# Altium PCB ControlBoard.PcbDoc
Units mm, origin at the board's own origin, x right, y up, seen from the top; angles counter-clockwise.
Board outline 152.43 x 60.17 mm, 2 copper layers (Top Layer, Bottom Layer); 140 components, 89 nets, 445 pads, 166 vias.
Unrouted connection lines stored in the file: 69.
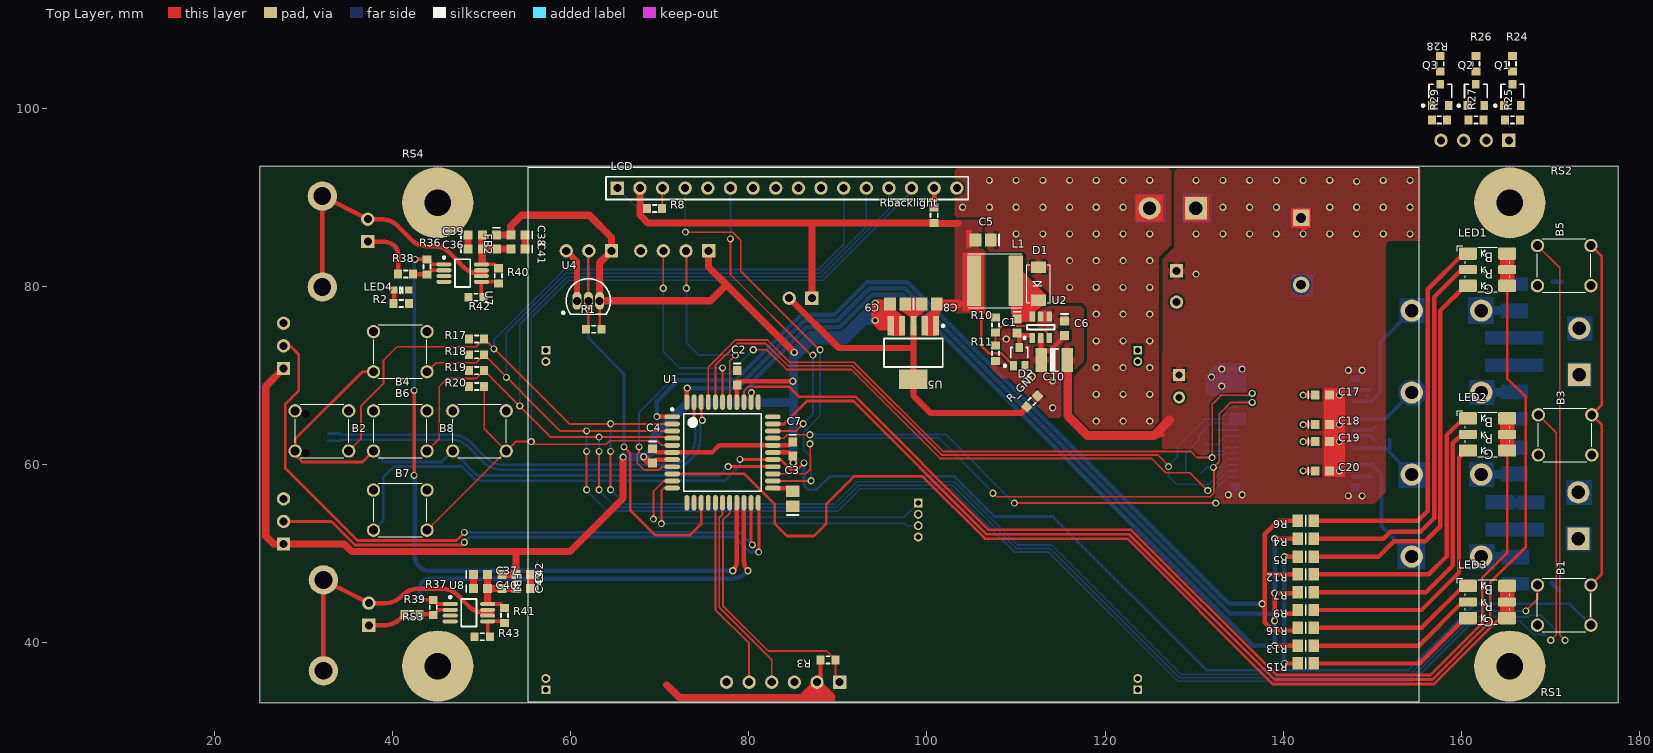
[diagram p0: Top Layer view]
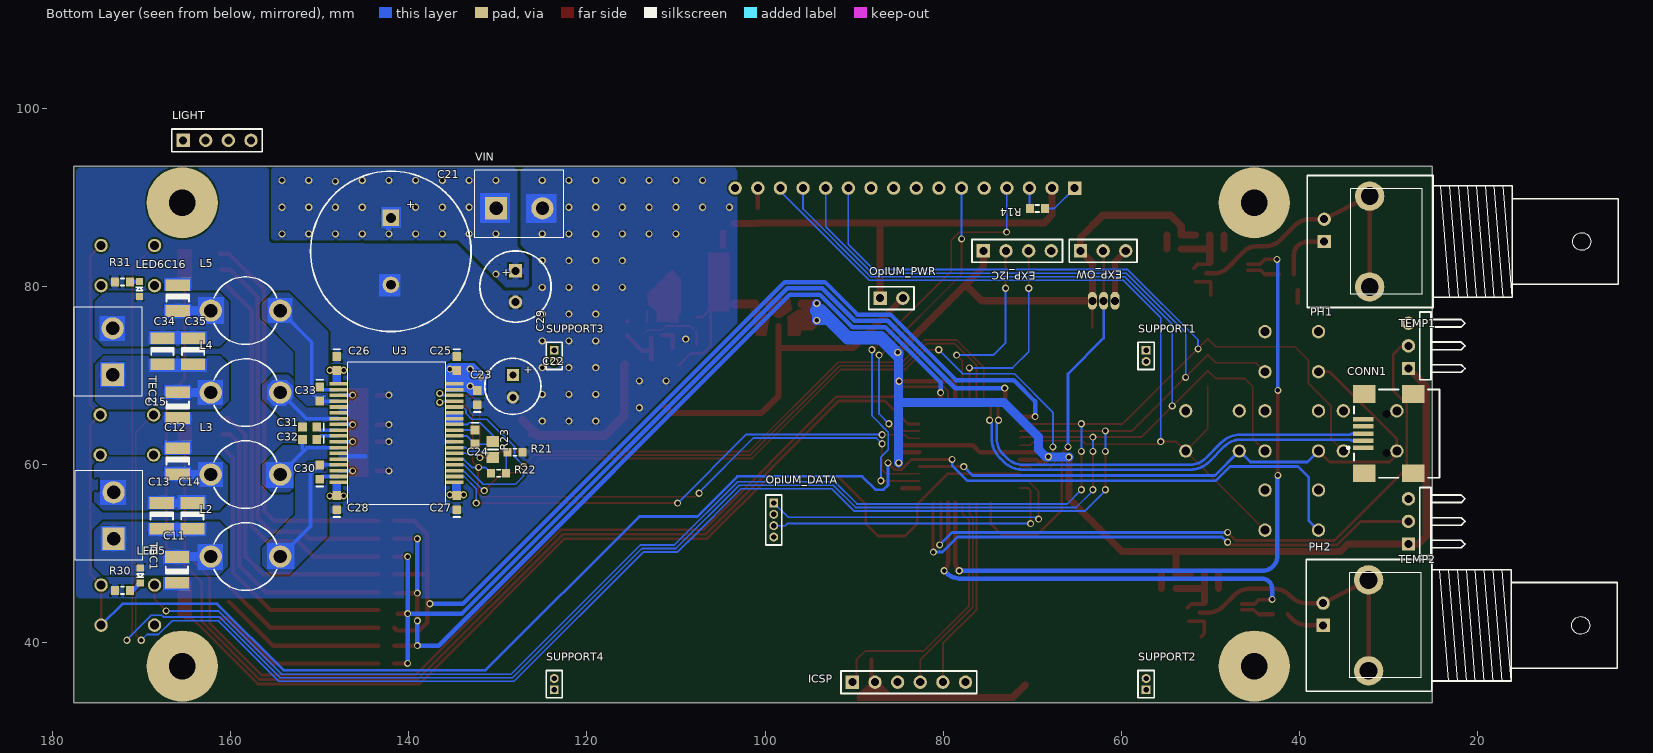
[diagram p1: Bottom Layer view, seen from below]

## Layer stack, top to bottom
Top Layer: signal copper 0.0356
Dielectric: dielectric 0.32, FR-4, Dk 4.8
Bottom Layer: signal copper 0.0356

## Board outline
25.15,33.3 177.575,33.3 177.546,93.472 25.146,93.472

## Design rules (kind name [scope] priority, off if disabled: settings)
Clearance [All] p1: gap=0.2
DiffPairsRouting [All] p1: maxlimit=0.254 minlimit=0.254 mostfreqgap=0.254 maxuncoupledlength=12.7
HoleSize [All] p1: absolutevalues=TRUE maxlimit=12.7 minlimit=0.5 maxpercent=80.000 minpercent=20.000
PolygonConnect [All] p1: connectstyle=Relief reliefconductorwidth=0.762 reliefentries=4 polygonreliefangle="90 Angle"
RoutingVias [All] p1: holewidth=0.5 width=0.8 viastyle="Through Hole" minholewidth=0.5 minwidth=0.8 maxholewidth=12.7 maxwidth=14
SilkscreenOverComponentPads [All] p1: minsilkscreentomaskgap=0.254
SolderMaskExpansion [All] p1: expansion=0.102
Width [All] p1: maxlimit=500 minlimit=0.2 preferedwidth=0.2
25 further rules are at their usual default settings.

## Classes and differential pairs
component class ControlBoard: C1 C2 C3 C4 C5 C6 C7 C8 C9 C10 D1 D2 ICSP L1 LED4 OpIUM_DATA OpIUM_PWR R1 R2 R3 R10 R11 R_GND RS1 RS2 RS3 RS4 SUPPORT1 SUPPORT2 SUPPORT3 SUPPORT4 U1 U2 U4 U5 VIN
component class IOBoard: B1 B2 B3 B4 B5 B6 B7 B8 C36 C37 C38 C39 C40 C41 C42 C43 CONN1 EXP_I2C EXP_OW FB1 FB2 LCD LED1 LED2 LED3 LIGHT PH1 PH2 Q1 Q2 Q3 R4 R5 R6 R7 R8 R9 R12 R13 R14 R15 R16 R17 R18 R19 R20 R24 R25 R26 R27 R28 R29 R36 R37 R38 R39 R40 R41 R42 R43 Rbacklight TEMP1 TEMP2 U7 U8
component class TECBoard: C11 C12 C13 C14 C15 C16 C17 C18 C19 C20 C21 C22 C23 C24 C25 C26 C27 C28 C29 C30 C31 C32 C33 C34 C35 L2 L3 L4 L5 LED5 LED6 R21 R22 R23 R30 R31 TEC1 TEC2 U3
differential pair USB_D: +USB_D_P -USB_D_N

## Components (designator, comment, footprint, x,y, rotation, side; value= is the part's Value field where it differs from the comment)
B1 "Tact Button NO" "Tact TH 4pin 6×6mm" 175,46.5 r180 top
B2 "Tact Button NO" "Tact TH 4pin 6×6mm" 28.605,61.546 r0 top
B3 "Tact Button NO" "Tact TH 4pin 6×6mm" 175.1,65.6 r180 top
B4 "Tact Button NO" "Tact TH 4pin 6×6mm" 37.395,70.436 r0 top
B5 "Tact Button NO" "Tact TH 4pin 6×6mm" 175,84.6 r180 top
B6 "Tact Button NO" "Tact TH 4pin 6×6mm" 37.395,61.546 r0 top
B7 "Tact Button NO" "Tact TH 4pin 6×6mm" 37.395,52.656 r0 top
B8 "Tact Button NO" "Tact TH 4pin 6×6mm" 46.285,61.546 r0 top
C1 "100nF" CAPC1608N 110.1,75.563 r270 top
C2 "100nF" CAPC1608N 78.711,69.763 r270 top
C3 "10µF" CAPC2012N 84.934,56.174 r90 top
C4 "100nF" CAPC1608N 69.186,61 r270 top
C5 "10µF" CAPC2012N 106.29,85.215 r180 top
C6 "100nF" CAPC1608N 115.434,75.309 r270 top
C7 "100nF" CAPC1608N 84.934,61.762 r270 top
C8 "10µF" CAPC2012N 100.254,78.043 r0 top
C9 "10µF" CAPC2012N 96.698,78.043 r180 top
C10 "10µF" CAPC3225N 114.291,71.753 r0 top
C11 "10µF" CAPC3225N 166,48.2 r90 bottom
C12 "10µF" CAPC3225N 165.9,60.4 r270 bottom
C13 "10µF" CAPC3225N 167.694,54.262 r270 bottom
C14 "10µF" CAPC3225N 164.265,54.262 r270 bottom
C15 "10µF" CAPC3225N 165.9,66.7 r90 bottom
C16 "10µF" CAPC3225N 165.9,78.7 r270 bottom
C17 "100nF" CAPC1608N 144.373,67.811 r0 top
C18 "100nF" CAPC1608N 144.373,64.509 r0 top
C19 "100nF" CAPC1608N 144.373,62.604 r0 top
C20 "100nF" CAPC1608N 144.373,59.302 r0 top
C21 "2200µF" CAPPR7.5-18x35.5 141.986,83.947 r270 bottom
C22 "56µF" CAPPR2.5-6.3x15 128.298,68.803 r270 bottom
C23 "100nF" CAPC1608N 132.289,67.53 r90 bottom
C24 "100nF" CAPC1608N 132.562,63.112 r270 bottom
C25 "100nF" CAPC1608N 134.594,71.367 r270 bottom
C26 "100nF" CAPC1608N 148.056,71.367 r270 bottom
C27 "100nF" CAPC1608N 134.594,55.746 r90 bottom
C28 "100nF" CAPC1608N 148.056,55.746 r90 bottom
C29 "220µF" CAPPR3.5-8x15 128,80 r270 bottom
C30 "100nF" CAPC1608N 149.961,59.175 r90 bottom
C31 "100nF" CAPC1608N 151.104,62.831 r0 bottom
C32 "100nF" CAPC1608N 151.104,64.255 r0 bottom
C33 "100nF" CAPC1608N 149.961,67.938 r270 bottom
C34 "10µF" CAPC3225N 167.613,72.723 r270 bottom
C35 "10µF" CAPC3225N 164.184,72.723 r270 bottom
C36 "1µF" CAPC1608N 49.3,84.2 r0 top
C37 "1µF" CAPC1608N 49.9,47.7 r0 top
C38 "1µF" CAPC1608N 54.1,85.8 r180 top
C39 "100nF" CAPC1608N 49.3,85.8 r0 top
C40 "100nF" CAPC1608N 49.9,46.1 r0 top
C41 "1µF" CAPC1608N 54.1,84.2 r180 top
C42 "1µF" CAPC1608N 54.7,47.7 r180 top
C43 "1µF" CAPC1608N 54.7,46.1 r180 top
CONN1 "USB-Conn Mini-B SMD" 440478 25,63.5 r180 bottom
D1 "Schottky Diode" DO-214AC 112.513,82.167 r90 top
D2 "Diode" SOT323 110.354,72.134 r0 top
EXP_I2C "Header 4" HDR1X4 75.5,84 r180 bottom
EXP_OW "Header 3" HDR1X3 64.6,84 r180 bottom
FB1 "150R" INDC1608N 52.3,46.9 r270 top
FB2 "150R" INDC1608N 51.7,85 r270 top
ICSP "Header 6" HDR1X6 90.2,35.6 r180 bottom
L1 "15µH" "INDUCTOR 6×6mm Taiyo Yuden" 109.973,80.643 r180 top
L2 "10nH" "Inductor 9.1×7.6mm TH" 154.4,49.7 r0 bottom
L3 "10nH" "Inductor 9.1×7.6mm TH" 154.4,58.9 r0 bottom
L4 "10nH" "Inductor 9.1×7.6mm TH" 154.4,68.1 r0 bottom
L5 "10nH" "Inductor 9.1×7.6mm TH" 154.4,77.3 r0 bottom
LCD "Header 16" HDR1X16 65.25,91.045 r0 top
LED1 "LED RGB" "LED PLCC-6" 160.7,80.1 r90 top
LED2 "LED RGB" "LED PLCC-6" 160.7,61.6 r90 top
LED3 "LED RGB" "LED PLCC-6" 160.7,42.8 r90 top
LED4 "" "LED 1608m" 40.2,79.6 r270 top
LED5 "Red" "LED 1608m" 170.1,48.4 r0 bottom
LED6 "Blue" "LED 1608m" 170.2,78.9 r180 bottom
LIGHT "Header 4" HDR1X4 165.3,96.4 r180 bottom
OpIUM_DATA "MHDR1X4" MHDR1X4 99.016,55.705 r270 bottom
OpIUM_PWR "Header 2" HDR1X2 87.078,78.692 r180 bottom
PH1 "BNC" "BNC_RA CON" 37.25,85.05 r0 bottom
PH2 "BNC" "BNC_RA CON" 37.375,41.975 r0 bottom
Q1 "S8050" SOT23 165.7,101.5 r0 top
Q2 "S8050" SOT23 161.6,101.5 r0 top
Q3 "S8050" SOT23 157.6,101.5 r0 top
R1 "4.7K" RESC1608N 62.6,75.2 r0 top
R2 "1K" RESC1608N 41,78.1 r0 top
R3 "10K" RESC1608N 88.9,38.1 r180 top
R4 "470" RESC2012N 142.5,51.7 r180 top
R5 "330" RESC2012N 142.5,49.7 r180 top
R6 "330" RESC2012N 142.5,53.7 r180 top
R7 "470" RESC2012N 142.5,45.7 r180 top
R8 "1K" RESC1608N 69.441,88.759 r180 top
R9 "330" RESC2012N 142.5,43.7 r180 top
R10 "52.3K" RESC1608N 107.687,75.69 r90 top
R11 "10K" RESC1608N 107.687,72.515 r90 top
R12 "330" RESC2012N 142.5,47.7 r180 top
R13 "470" RESC2012N 142.5,39.7 r180 top
R14 "10K" RESC1608N 69.441,88.759 r180 bottom
R15 "330" RESC2012N 142.5,37.7 r180 top
R16 "330" RESC2012N 142.5,41.7 r180 top
R17 "100K" RESC1608N 49.46,74.119 r180 top
R18 "100K" RESC1608N 49.46,72.341 r180 top
R19 "100K" RESC1608N 49.46,70.563 r180 top
R20 "100K" RESC1608N 49.46,68.785 r180 top
R21 "0" RESC1608N 128.063,61.399 r0 bottom
R22 "10K" RESC1608N 129.895,59.048 r0 bottom
R23 "27K" RESC2012N 130.53,61.715 r270 bottom
R24 "1K" RESC1608N 165.7,105 r90 top
R25 "1K" RESC1608N 165.7,98.7 r180 top
R26 "1K" RESC1608N 161.6,105 r90 top
R27 "1K" RESC1608N 161.6,98.7 r180 top
R28 "1K" RESC1608N 157.6,105 r90 top
R29 "1K" RESC1608N 157.5,98.7 r180 top
R30 "1K" RESC1608N 172.1,45.9 r0 bottom
R31 "1K" RESC1608N 172.1,80.5 r0 bottom
R36 "30.9K" RESC1608N 43.9,82.2 r90 top
R37 "30.9K" RESC1608N 44.6,44 r90 top
R38 "10K" RESC1608N 41.5,81.4 r0 top
R39 "10K" RESC1608N 42.2,43.2 r0 top
R40 "10K" RESC1608N 51.9,81.2 r90 top
R41 "10K" RESC1608N 52.6,43.1 r90 top
R42 "10K" RESC1608N 49.4,78.8 r180 top
R43 "10K" RESC1608N 50.1,40.7 r180 top
R_GND "0" RESC1608N 111.8,67.1 r225 top
Rbacklight "1K" RESC1608N 100.81,87.997 r90 top
RS1 "PCB Riser" "PCB Riser 6×10mm 3mm" 165.4,37.4 r0 top
RS2 "PCB Riser" "PCB Riser 6×10mm 3mm" 165.4,89.4 r0 top
RS3 "PCB Riser" "PCB Riser 6×10mm 3mm" 45.1,37.4 r0 top
RS4 "PCB Riser" "PCB Riser 6×10mm 3mm" 45.1,89.4 r0 top
SUPPORT1 "MHDR1X2" MHDR1X2 57.233,72.85 r270 bottom
SUPPORT2 "MHDR1X2" MHDR1X2 57.233,34.75 r90 bottom
SUPPORT3 "MHDR1X2" MHDR1X2 123.654,72.85 r270 bottom
SUPPORT4 "MHDR1X2" MHDR1X2 123.654,34.75 r90 bottom
TEC1 "High-Power Connector 2p" "High-Power Connector 2" 173.1,51.7 r90 bottom
TEC2 "High-Power Connector 2p" "High-Power Connector 2" 173.2,70.1 r90 bottom
TEMP1 "Header 3H" HDR1X3H 27.8,70.8 r90 bottom
TEMP2 "Header 3H" HDR1X3H 27.8,51.1 r90 bottom
U1 "PIC18F47J53" TQFP-PT44_N 77.06,61.381 r0 top
U2 "MCP16301" SOT23-6_N 112.767,75.436 r90 top
U3 "DRV8432" PSOP3-36 134.848,58.032 r90 bottom
U4 "DS18B20" TO-92A 62,78.4 r270 top
U5 "TPS7A4533" SOT223-6N 98.476,72.582 r270 top
U7 "MAX4477" UMAX8_N 47.9,81.5 r0 top
U8 "MAX4477" UMAX8_N 48.6,43.4 r0 top
VIN "High-Power Connector 2p" "High-Power Connector 2" 130.175,88.773 r180 bottom

## Footprints (in the part's own frame and the unit in brackets; to place one, negate y for a bottom-side part, rotate by r counter-clockwise, add the part's x,y. Pads: shape width x height; smd on the part's side, far side on the other; paste and mask are expansions set on the pad)
440478 [mm] "Connector; USB2.0, Type A, SM; 5 Position; Right Angle"
  rect 2.3x0.5 smd: 1(-7.85,-1.6) 2(-7.85,-0.8) 3(-7.85,0) 4(-7.85,0.8) 5(-7.85,1.6)
  rect 2.5x2 smd: 6(-7.75,4.45) 7(-2.25,4.45) 8(-7.75,-4.45) 9(-2.25,-4.45)
  round 0.6 hole 0.9 unplated: MH1(-5.25,2.2) MH2(-5.25,-2.2)
  silkscreen extent -9.68,-4.95 0.7,4.95
"BNC_RA CON" [mm] "Connector; BNC Elbow"
  rect 1.5x1.5 hole 0.9: 1(0,0)
  round 3.3 hole 2: 2(-5.1,-5.1) 2(-5.1,5.1)
  round 1.5 hole 0.9: 2(0,-2.5)
  silkscreen extent -33,-7.4 1.9,7.4
CAPC1608N [mm] "Chip Capacitor, Body 1.6x0.8mm, IPC Medium Density"
  rect 1x1 smd: 1(-0.8,0) 2(0.8,0)
  silkscreen extent -1.6,-0.4 -1.6,0.4, body extent -0.87,-0.48 0.87,0.48, height 0.85
CAPC2012N [mm] "Chip Capacitor, Body 2.0x1.3mm, IPC Medium Density"
  rect 1.3x1.5 smd: 1(-0.85,0) 2(0.85,0)
  silkscreen extent -1.8,-0.65 -1.8,0.65, body extent -1.1,-0.72 1.1,0.72, height 1.1
CAPC3225N [mm] "Chip Capacitor, Body 3.2x2.5mm, IPC Medium Density"
  rect 1.3x2.7 smd: 1(-1.45,0) 2(1.45,0)
  silkscreen extent -0.4,-1.25 0.4,1.25, body extent -1.7,-1.35 1.7,1.35, height 1.35
CAPPR2.5-6.3x15 [mm] "Capacitor, Electrolytic, Radial; Body 6.3 x 15 mm (Dia.xH typ); Pin Spacing 2.5 mm (typ)"
  rect 1.35x1.35 hole 0.8: 1(-1.25,0)
  round 1.35 hole 0.8: 2(1.25,0)
  silkscreen extent -3.15,-3.15 3.15,3.15
CAPPR3.5-8x15 [mm] "Capacitor, Electrolytic, Radial; Body 8 x 15 mm (Dia.xH typ); Pin Spacing 3.5 mm (typ)"
  rect 1.5x1.5 hole 0.9: 1(-1.75,0)
  round 1.5 hole 0.9: 2(1.75,0)
  silkscreen extent -4,-4 4,4
CAPPR7.5-18x35.5 [mm] "Capacitor, Electrolytic, Radial; Body 18 x 35.5 mm (Dia.xH typ); Pin Spacing 7.5 mm (typ)"
  rect 1.85x1.85 hole 1.1: 1(-3.75,0)
  round 1.85 hole 1.1: 2(3.75,0)
  silkscreen extent -9,-9 9,9
DO-214AC [mm] "DO-214AC Diode 4.25×2.65mm"
  rrect10% 1.32x1.68 smd: A(0,0) K(-3.7,0)
  silkscreen extent -3.98,-1.33 0.28,1.33, body extent -3.98,-1.33 0.28,1.33, height 2.15
HDR1X2 [mm] "Connector; Header; 2 Position"
  rect 1.5x1.5 hole 0.9: 1(0,0)
  round 1.5 hole 0.9: 2(2.54,0)
  silkscreen extent -1.27,-1.27 3.81,1.27
HDR1X3 [mm] "Connector; Header; 3 Position"
  rect 1.5x1.5 hole 0.9: 1(0,0)
  round 1.5 hole 0.9: 2(2.54,0) 3(5.08,0)
  silkscreen extent -1.27,-1.27 6.35,1.27
HDR1X3H [mm] "Connector; Header; 3 Position; Right Angle"
  rect 1.5x1.5 hole 0.9: 1(0,0)
  round 1.5 hole 0.9: 2(2.54,0) 3(5.08,0)
  silkscreen extent -1.27,-6.35 6.35,-1.27
HDR1X4 [mm] "Connector; Header; 4 Position"
  rect 1.5x1.5 hole 0.9: 1(0,0)
  round 1.5 hole 0.9: 2(2.54,0) 3(5.08,0) 4(7.62,0)
  silkscreen extent -1.27,-1.27 8.89,1.27
HDR1X6 [mm] "Connector; Header; 6 Position"
  rect 1.5x1.5 hole 0.9: 1(0,0)
  round 1.5 hole 0.9: 2(2.54,0) 3(5.08,0) 4(7.62,0) 5(10.16,0) 6(12.7,0)
  silkscreen extent -1.27,-1.27 13.97,1.27
HDR1X16 [mm] "Connector; Header; 16 Position"
  rect 1.5x1.5 hole 0.9: 1(0,0)
  round 1.5 hole 0.9: 2(2.54,0) 3(5.08,0) 4(7.62,0) 5(10.16,0) 6(12.7,0) 7(15.24,0) 8(17.78,0) 9(20.32,0) 10(22.86,0) 11(25.4,0) 12(27.94,0) 13(30.48,0) 14(33.02,0) 15(35.56,0) 16(38.1,0)
  silkscreen extent -1.27,-1.27 39.37,1.27
"High-Power Connector 2" [mm] "High-Power connector 2pin with screw"
  rect 2.5x2.5 hole 1.5: 1(0,0)
  round 2.5 hole 1.5: 2(5.2,0)
  silkscreen extent -2.4,-3.3 7.6,4.3, body extent -2.4,-3.3 7.6,4.3, height 9.9
INDC1608N [mm] "Chip Inductor, Body 1.6x0.8mm, IPC Medium Density"
  rect 1x1 smd: 1(-0.8,0) 2(0.8,0)
  silkscreen extent -1.6,-0.4 -1.6,0.4, body extent -0.87,-0.48 0.87,0.48, height 0.71
"INDUCTOR 6×6mm Taiyo Yuden" [mm] "Inductor 6×6mm body Taiyo Yuden SMD Power"
  rrect10% 1.6x5.7 smd: 1(0,0) 2(4.7,0)
  silkscreen extent -0.65,-3.05 5.35,3.05, body extent -0.63,-2.99 5.35,2.99, height 2.8
"Inductor 9.1×7.6mm TH" [mm] "Power Inductor TH 1.1×7.6mm body"
  round 2.5 hole 1.5: 1(0,0) 2(7.8,0)
  silkscreen extent 0.36,-3.8 7.43,3.8, body extent 0.11,-3.79 7.68,3.79, height 13.6
"LED 1608m" [mm] "LED 1608 1.6x0.8mm"
  rrect10% 0.8x0.8 smd: 1(0,0) 2(0,1.65)
  silkscreen extent -0.4,0.62 0.4,1, body extent -0.4,0.03 0.4,1.63, height 0.75
"LED PLCC-6" [mm] "LED SMD PLCC-6 5×5mm body 6pin"
  rrect20% 1.4x2 smd: 1(0,0) 2(0,-4.4) 5(3.6,0) 6(3.6,-4.4)
  rrect20% 1x2 smd: 3(1.8,0) 4(1.8,-4.4)
  silkscreen extent -0.7,-4.7 4.47,1.17, body extent -0.7,-4.7 4.3,0.3, height 1.5
MHDR1X2 [mm] "Connector; Header; 2 Position"
  rect 1x1 hole 0.6: 1(0,0)
  round 1 hole 0.6: 2(1.27,0)
  silkscreen extent -0.9,-0.9 2.17,0.9
MHDR1X4 [mm] "Connector; Header; 4 Position"
  rect 1x1 hole 0.6: 1(0,0)
  round 1 hole 0.6: 2(1.27,0) 3(2.54,0) 4(3.81,0)
  silkscreen extent -0.9,-0.9 4.71,0.9
"PCB Riser 6×10mm 3mm" [mm] "Screw PSB Riser 6×10mm body 3mm hole"
  round 8 hole 3: 1(0,0)
  body extent -2.98,-2.99 3,2.99, height 10
PSOP3-36 [mm] "PSOP3 36pin 11×15.9mm body"
  rrect10% 0.4x2 smd: 1(0,0) 2(0.65,0) 3(1.3,0) 4(1.95,0) 5(2.6,0) 6(3.25,0) 7(3.9,0) 8(4.55,0) 9(5.2,0) 10(5.85,0) 11(6.5,0) 12(7.15,0) 13(7.8,0) 14(8.45,0) 15(9.1,0) 16(9.75,0) 17(10.4,0) 18(11.05,0) 19(11.05,13) 20(10.4,13) 21(9.75,13) 22(9.1,13) 23(8.45,13) 24(7.8,13) 25(7.15,13) 26(6.5,13) 27(5.85,13) 28(5.2,13) 29(4.55,13) 30(3.9,13) 31(3.25,13) 32(2.6,13) 33(1.95,13) 34(1.3,13) 35(0.65,13) 36(0,13)
  silkscreen extent -2.52,1 13.47,12, body extent -2.52,1 13.47,12, height 3.55
RESC1608N [mm] "Chip Resistor, Body 1.6x0.8mm, IPC Medium Density"
  rect 0.9x1 smd: 1(-0.85,0) 2(0.85,0)
  silkscreen extent -0.2,-0.4 0.2,0.4, body extent -0.85,-0.48 0.85,0.48, height 0.6
RESC2012N [mm] "Chip Resistor, Body 2.0x1.3mm, IPC Medium Density"
  rect 1.2x1.4 smd: 1(-0.9,0) 2(0.9,0)
  silkscreen extent 0,-0.6 0,0.6, body extent -1.07,-0.7 1.07,0.7, height 0.65
SOT23 [mm] "SOT-23; 3 Leads; Body 3.0 x 2.5 mm, inc. leads (LxW max)"
  rect 0.85x1 smd: 1(-0.95,-1.2) 2(0.95,-1.2) 3(0,1.2)
  silkscreen extent -2.05,-1.32 1.28,1.2
SOT23-6_N [mm] "SOT23, 6-Leads, Body 2.9x1.6mm, Pitch 0.95mm, Lead Span 2.7mm, IPC Medium Density"
  rect 1.1x0.65 smd: 1(-1.2,0.95) 2(-1.2,0) 3(-1.2,-0.95) 4(1.2,-0.95) 5(1.2,0) 6(1.2,0.95)
  silkscreen extent -1.32,-1.55 0.25,1.95, body extent -0.9,-1.55 0.9,1.55, height 1.45
SOT223-6N [mm] "SOT223, 6-Leads, Body 6.5x3.5mm, Pitch 1.27mm, Lead Span 7mm, IPC Medium Density"
  rect 2.2x0.7 smd: 1(-3,2.54) 2(-3,1.27) 3(-3,0) 4(-3,-1.27) 5(-3,-2.54)
  rect 2.2x3.2 smd: 6(3,0)
  silkscreen extent -3.12,-3.3 1.6,3.47, body extent -1.77,-3.27 1.77,3.27, height 1.8
SOT323 [mm] "SOT-323/SC-70; 3 Leads; Body 2.2 x 2.2 mm, inc. leads (LxW max)"
  rect 0.8x1.05 smd: 1(-0.65,-1.025) 2(0.65,-1.025) 3(0,1.025)
  silkscreen extent -1.72,-1.15 0.95,1.03
"Tact TH 4pin 6×6mm" [mm] "Tactile push button TH 6×6mm body 4pin"
  round 1.5 hole 1: 1(0.5,0) 2(6.5,0) 3(0.5,4.5) 4(6.5,4.5)
  silkscreen extent 0.5,-0.75 6.5,5.25, body extent 0.5,-0.75 6.5,5.25, height 5.7
TO-92A [mm] "TO, Flat Index; 3 In-Line, Axial Leads; Body Dia. 4.5mm; Leads 0.51 x 0.48 mm (max)"
  oval 2x1 hole 0.9: 1(0,-1.27) 2(0,0) 3(0,1.27)
  silkscreen extent -2.48,-2.95 1.5,2.48, body extent -2.5,-2.5 1.5,2.5, height 6.86
TQFP-PT44_N [mm] "Thin QFP, 44-Leads, Body 10x10mm, Pitch 0.8mm, IPC Medium Density"
  oval 1.75x0.55 smd: 1(-5.65,4) 2(-5.65,3.2) 3(-5.65,2.4) 4(-5.65,1.6) 5(-5.65,0.8) 6(-5.65,0) 7(-5.65,-0.8) 8(-5.65,-1.6) 9(-5.65,-2.4) 10(-5.65,-3.2) 11(-5.65,-4) 23(5.65,-4) 24(5.65,-3.2) 25(5.65,-2.4) 26(5.65,-1.6) 27(5.65,-0.8) 28(5.65,0) 29(5.65,0.8) 30(5.65,1.6) 31(5.65,2.4) 32(5.65,3.2) 33(5.65,4)
  oval 0.55x1.75 smd: 12(-4,-5.65) 13(-3.2,-5.65) 14(-2.4,-5.65) 15(-1.6,-5.65) 16(-0.8,-5.65) 17(0,-5.65) 18(0.8,-5.65) 19(1.6,-5.65) 20(2.4,-5.65) 21(3.2,-5.65) 22(4,-5.65) 34(4,5.65) 35(3.2,5.65) 36(2.4,5.65) 37(1.6,5.65) 38(0.8,5.65) 39(0,5.65) 40(-0.8,5.65) 41(-1.6,5.65) 42(-2.4,5.65) 43(-3.2,5.65) 44(-4,5.65)
  silkscreen extent -5.77,-4.35 4.35,4.95, body extent -5,-5 5,5, height 1.2
UMAX8_N [mm] "TSOP, 8-Leads, Body 3x3mm, Pitch 0.65mm, IPC Medium Density"
  oval 1.7x0.45 smd: 1(-2.1,0.975) 2(-2.1,0.325) 3(-2.1,-0.325) 4(-2.1,-0.975) 5(2.1,-0.975) 6(2.1,-0.325) 7(2.1,0.325) 8(2.1,0.975)
  silkscreen extent -2.22,-1.55 0.85,1.87, body extent -1.6,-1.6 1.6,1.6, height 1.1

## Part data
C1 C2 C3 C4 C5 C6 C7 C8 C9 C10 C11 C12 C13 C14 C15 C16 C17 C18 C19 C20 C23 C24 C25 C26 C27 C28 C30 C31 C32 C33 C34 C35 C36 C37 C38 C39 C40 C41 C42 C43: library part Capacitor
C21 C22 C29: library part "Capacitor Polarised"
EXP_I2C LIGHT OpIUM_DATA: "Header, 4-Pin"
EXP_OW: "Header, 3-Pin"
FB1 FB2 L1 L2 L3 L4 L5: library part Inductor
ICSP: "Header, 6-Pin"
LCD: "Header, 16-Pin"
LED4 LED5 LED6: library part LED
OpIUM_PWR SUPPORT1 SUPPORT2 SUPPORT3 SUPPORT4: "Header, 2-Pin"
PH1 PH2: "BNC Elbow Connector"
Q1 Q2 Q3: library part NPN
R1 R2 R3 R4 R5 R6 R7 R8 R9 R10 R11 R12 R13 R14 R15 R16 R17 R18 R19 R20 R21 R22 R23 R24 R25 R26 R27 R28 R29 R30 R31 R36 R37 R38 R39 R40 R41 R42 R43 R_GND Rbacklight: library part Resistor
TEMP1 TEMP2: "Header, 3-Pin, Right Angle"
U5: library part TPS7A45xx
U7 U8: library part "Opamp dual"

## Via types
v1: diameter 0.8, hole 0.508, Top Layer to Bottom Layer, tented both sides, 166 vias

## Nets (pads, with @x,y where several pads share a name; then routed paths per layer and width w, separated by ;. In a path a pad name is that pad's centre, name@x,y a point inside that pad or via, vN(x,y) a via of type N, cw(c..) or ccw(c..) an arc to the next point about the centre after c; other vN are vias at no path point)
AGND: C24.2 R21.2 R22.1 R23.1 U3.9 U3.11 U3.12 U3.13 | length 13.9
  Bottom Layer w0.2: R22.1 129.045,61.23 R23.1@130.43,62.615 ; R23.1 130.53,63.304 131.938,64.712 133.186,64.712 133.366,64.532 U3.11 ; R23.1@131.164,62.312 C24.2 133.482,63.232 U3.9
AVDD: C36.2 C37.2 C39.2 C40.2 C41.2 C43.2 FB1.2 FB2.2 R40.2 R41.2 U7.8 U8.8 | length 16.8
  Top Layer w0.4: U7.8 51.475,82.475 R40.2 ; U8.8 52.175,44.375 R41.2
  Top Layer w0.8: U7.8@50.1,82.7 C36.2 ; C39.2 C36.2 ; U8.8@50.7,44.55 C40.2 ; C37.2 C40.2 ; C41.2 FB2.2 C36.2 ; C43.2 FB1.2 C40.2
AVSS: C36.1 C37.1 C38.1 C39.1 C40.1 C41.1 C42.1 C43.1 R42.2 R43.2 U7.3 U7.4 U8.3 U8.4 | length 6.4
  Top Layer w0.8: C36.1 C39.1 ; C40.1 C37.1 ; C41.1 C38.1 ; C43.1 C42.1
GND: C5.1 C6.2 C10.1 C11.1 C12.1 C15.1 C16.1 C17.1 C18.1 C19.1 C20.1 C21.2 C22.2 C23.1 C25.1 C26.1 C27.1 C28.1 C29.2 D1.A R11.1 R21.1 R30.2 R31.2 R_GND.1 U2.2 U3.8 U3.23 U3.24 U3.31 U3.32 VIN.2 | length 13.1
  Top Layer w0.5: C10.1@112.767,71.827 C10.1@112.767,72.769 ; U2.2 C10.1@112.767,72.769 ; C6.2 115.434,74.442 113.761,72.769 C10.1@112.767,72.769 ; v1(142.214,59.302) C20.1 ; v1(142.214,62.604) C19.1 ; v1@142.214,64.504 C18.1@143.573,64.504 ; v1(142.214,67.811) C17.1
  Bottom Layer w0.5: 144.881,60.953 146.696,60.953
  other v1: 142.214,64.509 119,64.9 122,64.9 125,64.9 114.1,66.4 119,67.9 122,67.9 125,67.9 111.1,69.4 114.1,69.4 119,70.9 122,70.9 125,70.9 119,73.9 122,73.9 125,73.9 108.9,74.1 119,76.9 122,76.9 125,76.9 116,79.9 119,79.9 122,79.9 125,79.9 116,82.9 119,82.9 122,82.9 125,82.9 110,85.9 113,85.9 116,85.9 119,85.9 122,85.9 125,85.9 104,88.9 107,88.9 110,88.9 113,88.9 116,88.9 119,88.9 122,88.9 107,91.9 110,91.9 113,91.9 116,91.9 119,91.9 122,91.9 125,91.9
NetB1_1: B1.1 B1.3 B3.1 B5.1 B7.1 U1.27 | length 206.1
  Top Layer w0.3: v1@79.019,60.581 U1.27 83.558,60.581 84.689,59.45 85.45,59.45 v1(86.2,60.2) ; B1.3 B1.1 175.7,47.7 175.7,64.5 B3.1 175.7,66.7 175.7,83.4 B5.1
  Bottom Layer w0.3: B7.1 39,53.761 39,58.6 40.2,59.8 47.824,59.8 49.424,58.2 77.3,58.2 79,59.9 v1(79,60.6) ; v1(86.2,60.2) 86.2,57.7 86.7,57.2 87.6,57.2 89.1,58.7 103.1,58.7 107.6,54.2 114.1,54.2 131.35,36.95 154.05,36.95 161.5,44.4 172.1,44.4 B1.3
NetB1_2: B1.2 B2.2 LCD.11 R17.1 U1.2 | length 227.3
  Top Layer w0.2: B2.2 36.5,62.941 36.5,66.6 39,69.1 39,71.7 40.53,73.23 49.421,73.23 R17.1 59.848,64.581 U1.2 ; v1(64.5,57.2) v1(64.5,61.5) ; v1(167.2,43.6) 168.5,44.9 B1.2
  Bottom Layer w0.2: v1(51.4,73) 51.4,74 59.3,81.9 87.8,81.9 90.65,84.75 LCD.11 ; v1(64.5,57.2) 66.1,55.6 89.669,55.6 92.169,58.1 103.064,58.1 110.164,51 114,51 128.5,36.5 154.236,36.5 161.336,43.6 v1(167.2,43.6) ; v1(64.5,61.5) v1(64.5,64.6)
NetB2_1: B2.1 B4.1 B6.1 B8.1 U1.26 | length 70.7
  Top Layer w0.3: B6.1 36.649,60.3 29.9,60.3 29.105,61.095 B2.1 29.105,62.905 36.636,70.436 B4.1 ; v1(77.7,59.8) U1.26@82.691,59.8
  Bottom Layer w0.3: B6.1 39.141,60.3 45.539,60.3 B8.1 49.531,58.8 76.7,58.8 v1(77.7,59.8)
NetB3_2: B3.2 B4.2 LCD.12 R18.1 U1.3 | length 242.4
  Top Layer w0.2: B4.2 44.911,71.452 49.421,71.452 R18.1 58.87,63.781 62.891,63.781 62.91,63.8 71.391,63.8 U1.3 ; v1(61.8,57.2) v1(61.8,61.5) ; B3.2 170.6,63.6 170.6,40.9 v1(170,40.3)
  Bottom Layer w0.2: v1(52.8,69.8) 52.8,74.834 59.466,81.5 87.966,81.5 93.19,86.724 LCD.12 ; v1@61.8,57.1 64.1,54.8 90,54.8 92.5,57.3 99.7,57.3 102.7,57.3 108.684,51.316 108.716,51.316 109.832,50.2 113.669,50.2 128.169,35.7 154.568,35.7 161.368,42.5 166.515,42.5 168.065,40.95 169.35,40.95 v1(170,40.3) ; v1(61.8,61.5) v1(61.8,63.8)
NetB5_2: B5.2 B6.2 LCD.13 R19.1 U1.4 | length 270.8
  Top Layer w0.2: B6.2 45.269,62.92 45.269,68.785 46.158,69.674 49.421,69.674 R19.1 57.773,63.1 63.081,63.1 v1@63.2,62.981 ; v1(63.2,57.2) v1(63.2,61.5) ; v1(63.2,63.1) U1.4@71.291,63.1 ; U1.4@71.391,63 U1.4 ; B5.2 171,82.1 171,40.9 v1(171.6,40.3)
  Bottom Layer w0.2: v1(54.3,66.6) 54.3,75.769 59.631,81.1 88.131,81.1 95.73,88.699 LCD.13 ; v1@63.2,57.1 65.1,55.2 89.834,55.2 92.334,57.7 102.898,57.7 109.998,50.6 113.834,50.6 128.334,36.1 154.402,36.1 161.202,42.9 167.49,42.9 167.695,43.105 168.88,43.105 171.6,40.385 v1(171.6,40.3) ; v1(63.2,61.5) v1(63.2,63.1)
NetB7_2: B7.2 B8.2 LCD.14 R20.1 U1.5 | length 103.2
  Top Layer w0.2: B7.2 B8.2 ; R20.1 50.31,64.021 B8.2 ; U1.5 70.229,62.181 69.71,62.7 64.4,62.7 64,62.3 55.9,62.3 v1(55.6,62.6) 53.839,62.6 B8.2
  Bottom Layer w0.2: v1(55.6,62.6) 55.6,76.503 59.797,80.7 88.297,80.7 98.27,90.673 LCD.14
NetC1_1: C1.1 D1.K L1.1 U2.6
NetC1_2: C1.2 D2.3 U2.1 | length 2.5
  Top Layer w0.5: D2.3 110.354,74.509 U2.1@111.544,74.509
NetC3_2: C3.2 U1.23 | length 1.9
  Top Layer w0.5: U1.23 C3.2@84.577,57.381
NetC11_2: C11.2 C13.2 C14.2 L2.2 LED5.1 TEC1.1 | length 7.2
  Bottom Layer w1: L2.2 C11.2@165.95,49.7 ; C14.2 C13.2
NetC12_2: C12.2 C13.1 C14.1 L3.2 TEC1.2 | length 7.1
  Bottom Layer w1: L3.2 C12.2@165.85,58.9 ; C14.1 C13.1
NetC15_2: C15.2 C34.2 C35.2 L4.2 TEC2.1 | length 7.1
  Bottom Layer w1: L4.2 165.85,68.1 C15.2 ; C35.2 C34.2
NetC16_2: C16.2 C34.1 C35.1 L5.2 LED6.1 TEC2.2 | length 7.1
  Bottom Layer w1: L5.2 165.85,77.3 C16.2 ; C35.1 C34.1
NetC24_1: C24.1 U3.10 | length 2.3
  Bottom Layer w0.2: C24.1 U3.10@134.818,63.912
NetC30_1: C30.1 U3.35 | length 1.8
  Bottom Layer w0.4: U3.35 C30.1@149.654,58.682
NetC30_2: C30.2 L2.1 U3.33 | length 14.2
  Bottom Layer w0.4: U3.33 C30.2@149.954,59.982 ; C30.2 151,58.936 151,53.1 L2.1
NetC31_1: C31.1 U3.28 | length 2.7
  Bottom Layer w0.4: U3.28 149.803,63.232 C31.1@150.304,62.731
NetC31_2: C31.2 L3.1 U3.30 | length 9.1
  Bottom Layer w0.4: U3.30 147.849,61.931 151.369,61.931 L3.1 ; 151.75,61.65 151.904,61.804 C31.2
NetC32_1: C32.1 U3.27 | length 2.6
  Bottom Layer w0.4: U3.27 149.931,63.882 C32.1
NetC32_2: C32.2 L4.1 U3.25 | length 16.4
  Bottom Layer w0.4: U3.25 151.482,65.182 153.4,67.1 ; 153.199,67.434 153.366,67.434 153.1,67.7 153.1,68.665 153.735,69.3 155.198,69.3 155.7,68.798 155.7,67.402 155.098,66.8 153.907,66.8 153.607,67.1 153.4,67.1 ; L4.1 153.4,67.1
NetC33_1: C33.1 U3.20 | length 1.8
  Bottom Layer w0.4: U3.20 C33.1@149.655,68.432
NetC33_2: C33.2 L5.1 U3.22 | length 14.1
  Bottom Layer w0.4: U3.22 C33.2@149.955,67.132 ; C33.2 149.961,67.172 150.861,68.072 150.861,73.761 L5.1
NetEXP_I2C_2: EXP_I2C.2 U1.38 | length 21.9
  Top Layer w0.2: v1(73,79.8) EXP_I2C.2@73,83.96 ; U1.38 77.86,71.66 v1(78.5,72.3)
  Bottom Layer w0.2: v1(73,79.8) 73,73.7 74.4,72.3 v1(78.5,72.3)
NetEXP_I2C_3: EXP_I2C.3 U1.39 | length 22.5
  Top Layer w0.2: v1(70.4,79.8) EXP_I2C.3@70.4,83.98 ; U1.39 v1(77.06,70.86)
  Bottom Layer w0.2: v1(70.4,79.8) 70.4,72.7 72.24,70.86 v1(77.06,70.86)
NetEXP_OW_2: EXP_OW.2 R1.1 U1.14 U4.2 | length 46
  Top Layer w0.3: R1.1@62,75.45 U4.2 EXP_OW.2@62,83.94 ; v1@66,62.1 v1(66,62) 66.7,61.3 66.7,54.9 69.5,52.1 73.4,52.1 74.66,53.36 U1.14
  Bottom Layer w0.3: U4.2 62,74.2 66,70.2 v1(66,62)
NetICSP_1: ICSP.1 R3.1 U1.18 | length 29.7
  Top Layer w0.2: U1.18 77.86,54.56 77.1,53.8 77.1,44.2 82.2,39.1 88.75,39.1 R3.1 89.75,36.05 ICSP.1
NetICSP_4: ICSP.4 R29.1 U1.17 | length 22.7
  Top Layer w0.2: U1.17 77.06,54.46 76.7,54.1 76.7,44 82.58,38.12 ICSP.4
NetICSP_5: ICSP.5 R27.1 U1.16 | length 21.7
  Top Layer w0.2: U1.16 76.26,43.74 80.04,39.96 ICSP.5
NetLCD_3: LCD.3 R8.1 R14.1 | length 4.5
  Top Layer w0.2: R8.1 LCD.3@70.291,91.006
  Bottom Layer w0.2: R14.1@70.33,88.798 LCD.3
NetLCD_4: LCD.4 U1.24 | length 47.4
  Top Layer w0.2: v1(72.9,86.1) 78.2,86.1 79.1,85.2 79.1,81.7 87.4,73.4 v1@87.9,72.9 ; U1.24 v1@87,58.181
  Bottom Layer w0.2: v1@72.87,85.93 LCD.4 ; v1(87,58.2) 87,60.824 86.162,61.662 86.162,63.652 88,65.49 v1@88,72.6
  other v1: 88,72.9
NetLCD_6: LCD.6 U1.31 | length 34.6
  Top Layer w0.2: v1(77.95,85.35) 77.95,81.35 87,72.3 v1(87.2,72.3) ; U1.31 85.281,63.781 v1(86.1,64.6)
  Bottom Layer w0.2: v1(77.95,85.35) LCD.6 ; v1(86.1,64.6) 87.2,65.7 87.2,71.7 v1(87.2,72.3)
NetLCD_15: LCD.15 Rbacklight.2 | length 2.2
  Top Layer w0.5: Rbacklight.2 LCD.15
NetLED1_AB: LED1.2 LED1.4 LED1.6 U1.32 | length 137.4
  Top Layer w0.3: U1.32 83.981,64.581 86.546,67.146 91.746,67.146 106.693,52.2 122.693,52.2 138.993,35.9 156.707,35.9 163.2,42.393 163.2,46.8 167.2,50.8 167.2,67.6 165.1,69.7 LED1.2
NetLED1_KB: LED1.5 R6.1 | length 44.8
  Top Layer w0.5: R6.1 155.1,53.7 156.2,54.8 156.2,79.7 160.2,83.7 LED1.5@161.2,83.7
NetLED1_KG: LED1.1 R5.1 | length 43.8
  Top Layer w0.5: R5.1 150.7,49.7 152.4,51.4 155.9,51.4 157.6,53.1 157.6,77.3 LED1.1@160.4,80.1
NetLED1_KR: LED1.3 R4.1 | length 44.6
  Top Layer w0.5: R4.1 151.21,51.7 152.01,52.5 155.4,52.5 156.9,54 156.9,78.8 160,81.9 LED1.3@161,81.9
NetLED2_AB: LED2.2 LED2.4 LED2.6 U1.36 | length 120.5
  Top Layer w0.2: U1.36 79.46,68.25 80.01,68.8 80.59,68.8
  Top Layer w0.3: 80.698,68.763 84.502,68.763 85.619,67.646 91.954,67.646 106.9,52.7 122.9,52.7 139.2,36.4 156.5,36.4 162.3,42.2 162.3,47.3 165.1,50.1 LED2.2
NetLED2_KB: LED2.5 R12.1 | length 32.7
  Top Layer w0.5: R12.1 156.3,47.7 158.3,49.7 158.3,63.3 160.2,65.2 LED2.5@160.9,65.2
NetLED2_KG: LED2.1 R9.1 | length 32.1
  Top Layer w0.5: R9.1 155.5,43.7 159.7,47.9 159.7,60.8 LED2.1@160.5,61.6
NetLED2_KR: LED2.3 R7.1 | length 32.9
  Top Layer w0.5: R7.1 156,45.7 159,48.7 159,62.4 160,63.4 LED2.3@160.9,63.4
NetLED3_AB: LED3.2 LED3.4 LED3.6 U1.9 | length 114.7
  Top Layer w0.3: U1.9 79.519,58.981 82.9,55.6 82.9,53.4 84.3,52 87.3,52 88.7,53.4 88.7,55.6 91.8,58.7 99.486,58.7 106.486,51.7 122.486,51.7 138.786,35.4 156.914,35.4 164.314,42.8 LED3.2
NetLED3_KB: LED3.5 R16.1 | length 18.7
  Top Layer w0.5: R16.1 155.5,41.7 LED3.5@160.2,46.4
NetLED3_KG: LED3.1 R15.1 | length 19.8
  Top Layer w0.5: R15.1 155.3,37.7 160.4,42.8 LED3.1@161.1,42.8
NetLED3_KR: LED3.3 R13.1 | length 18.7
  Top Layer w0.5: R13.1 155.2,39.7 LED3.3@160.1,44.6
NetLED4_A: LED4.1 R2.1 | length 1.4
  Top Layer w0.5: R2.1@40.2,78.15 LED4.1
NetLED5_K: LED5.2 R30.1 | length 1.2
  Bottom Layer w0.5: LED5.2 R30.1@170.95,45.9
NetLED6_K: LED6.2 R31.1 | length 1.1
  Bottom Layer w0.5: LED6.2 R31.1@171.25,80.55
NetLIGHT_1: LIGHT.1 Q1.3 R24.1
NetLIGHT_2: LIGHT.2 Q2.3 R26.1
NetLIGHT_3: LIGHT.3 Q3.3 R28.1
NetOpIUM_DATA_1: OpIUM_DATA.1 U1.10 | length 36.2
  Top Layer w0.2: v1(69.3,53.9) 69.3,57 70.481,58.181 U1.10
  Bottom Layer w0.2: v1(69.3,53.9) 69.5,54.1 97.411,54.1 OpIUM_DATA.1
NetOpIUM_DATA_3: OpIUM_DATA.3 U1.11 | length 33.9
  Top Layer w0.2: v1(70.2,53.4) 70.2,57.1 70.481,57.381 U1.11
  Bottom Layer w0.2: v1(70.2,53.4) 97.5,53.4 97.735,53.165 OpIUM_DATA.3
NetOpIUM_DATA_4: OpIUM_DATA.4 R2.2
NetPH1_1: PH1.1 R38.1 | length 6.4
  Top Layer w0.5: PH1.1 ccw(c37.3,85.05) 37.3,85 39.2,85 cw(c39.2,83.55) 40.65,83.55 R38.1
NetPH1_2: PH1.2 U7.6 U7.7 | length 31.3
  Top Layer w0.5: PH1.2@32.15,79.95 32.15,90.15 37.25,87.55 38.798,87.55 cw(c38.798,85.01) 40.594,86.806 42.156,85.244 ccw(c43.952,87.04) 43.952,84.5 44.848,84.5 cw(c44.848,82.443) 46.303,83.897 48.134,82.066 ccw(c49.5,83.431) 49.5,81.5 50.5,81.5
NetPH2_1: PH2.1 R39.1 | length 4.4
  Top Layer w0.5: PH2.1 39.073,41.975 ccw(c39.073,44.515) 40.869,42.719 R39.1
NetPH2_2: PH2.2 U8.6 U8.7 | length 31.1
  Top Layer w0.5: PH2.2@32.275,36.875 32.275,47.075 37.375,44.475 39.223,44.475 ccw(c39.223,47.015) 41.019,45.219 41.156,45.356 cw(c42.952,43.56) 42.952,46.1 45.548,46.1 cw(c45.548,43.56) 47.344,45.356 48.556,44.144 ccw(c50.352,45.94) 50.352,43.4 51.2,43.4
NetQ1_1: Q1.1 R25.2
NetQ2_1: Q2.1 R27.2
NetQ3_1: Q3.1 R29.2
NetR4_2: R4.2 R7.2 R13.2 U1.35 | length 100.6
  Top Layer w0.5: U1.35 v1@80.26,68.06 ; v1(139,39.7) R13.2 ; v1(139,42.5) v1(139,45.6) R7.2@141.5,45.6 ; v1(139,51.7) R4.2
  Bottom Layer w0.5: v1(80.3,68.1) 80.3,69.244 86.506,75.45 90.206,75.45 93.857,79.1 97.22,79.1 136.62,39.7 v1(139,39.7) v1@139,42.3 ; v1@139,45.8 v1(139,51.7)
NetR5_2: R5.2 R9.2 R15.2 U1.44 | length 104.4
  Top Layer w0.5: U1.44 v1@73.06,68.56 ; v1(140.1,37.7) R15.2 ; v1(140.1,43.3) R9.2@141.2,43.3 ; v1(140.1,49.7) R5.2
  Bottom Layer w0.5: v1(73.1,68.6) 78.667,68.6 86.217,76.15 89.917,76.15 93.567,79.8 97.51,79.8 134.01,43.3 v1(140.1,43.3) ; v1(140.1,37.7) v1(140.1,43.3) ; v1(140.1,49.7) v1(140.1,43.3)
NetR6_2: R6.2 R12.2 R16.2 U1.1 | length 113.6
  Top Layer w0.5: v1@69.719,65.381 U1.1 ; 137.9,47.7 R12.2 ; R16.2 141.3,41.4 138.8,41.4 137.9,42.3 137.9,52.2 139.4,53.7 R6.2
  Bottom Layer w0.5: v1(69.7,65.4) 69.7,67.1 72.1,69.5 78.577,69.5 85.927,76.85 89.627,76.85 93.277,80.5 97.8,80.5 133.9,44.4 v1@137.3,44.4
  other v1: 137.6,44.4
NetR10_1: R10.1 R11.2 U2.3 | length 8.2
  Top Layer w0.2: R11.2 R10.1 108.41,75.563 111.137,75.563 111.614,75.086 113.216,75.086 113.689,74.613 U2.3@113.717,74.613
NetR22_2: R22.2 U1.25 U3.5 U3.15 | length 75.4
  Top Layer w0.2: U1.25 86.381,58.981 86.9,59.5 v1@86.9,62.324 ; v1(107.4,56.8) 107.8,56.4 131.79,56.4 132.2,56.81 v1@132.2,59.649 ; v1(132.148,59.7) 132.8,60.352 132.8,65.7 134.1,67 v1(136.5,67)
  Bottom Layer w0.2: v1(86.862,62.362) 87.5,63 101.3,63 107.4,56.9 v1(107.4,56.8) ; R22.2 131.397,59.7 v1(132.148,59.7) 132.9,59.7 133.832,60.632 U3.5 ; U3.15 v1@136.368,67.132
NetR23_2: R23.2 U3.7 | length 4.7
  Bottom Layer w0.2: R23.2@130.646,60.815 131.343,61.512 133.186,61.512 133.606,61.932 U3.7
NetR25_1: R25.1 U1.15
NetR36_1: R36.1 R38.2 U7.2 | length 3.6
  Top Layer w0.4: R36.1 44.375,81.825 U7.2
  Top Layer w0.5: R38.2 R36.1@43.85,81.4
NetR36_2: R36.2 U1.19 U7.1 | length 81.1
  Top Layer w0.4: v1(42.45,58.8) v1(42.45,68.35) ; v1(42.55,83.05) R36.2 44.475,82.475 U7.1
  Top Layer w0.5: v1(78.2,48.1) ccw(c77.089,49.211) 78.66,49.211 U1.19
  Bottom Layer w0.4: v1(42.45,68.35) v1@42.45,83
  Bottom Layer w0.5: v1@42.5,58.75 42.5,49.8 ccw(c44.2,49.8) 44.2,48.1 v1(78.2,48.1)
NetR37_1: R37.1 R39.2 U8.2 | length 3.6
  Top Layer w0.4: R37.1 45.175,43.725 U8.2
  Top Layer w0.5: R39.2 R37.1@44.55,43.2
NetR37_2: R37.2 U1.20 U8.1 | length 50.1
  Top Layer w0.4: v1@43.15,44.85 R37.2 45.075,44.375 U8.1
  Top Layer w0.5: U1.20 79.46,49.162 ccw(c80.962,49.162) v1(79.9,48.1)
  Bottom Layer w0.5: v1(43.1,44.9) cw(c43.1,45) 43,45 ccw(c43,45.1) 43.1,45.1 43.1,46.1 cw(c44.2,46.1) 44.2,47.2 77.948,47.2 ccw(c77.948,49.74) v1@79.744,47.944
NetR40_1: R40.1 R42.1 U7.5 | length 3.2
  Top Layer w0.4: R42.1@50,79.05 U7.5 R40.1@51.725,80.525
NetR41_1: R41.1 R43.1 U8.5 | length 3.6
  Top Layer w0.4: R43.1@51.05,40.7 50.7,41.05 U8.5 R41.1@52.425,42.425
NetTEMP1_2: TEMP1.2 U1.21 | length 76.8
  Top Layer w0.3: TEMP1.2 28.56,73.34 29.5,72.4 29.5,68.3 28,66.8 28,59.6 36.1,51.5 47.2,51.5 v1(48.1,52.4) ; v1@80.26,51.14 U1.21
  Bottom Layer w0.3: v1(48.1,52.4) 79,52.4 v1(80.4,51)
NetTEMP2_2: TEMP2.2 U1.22 | length 61
  Top Layer w0.3: TEMP2.2 33.16,53.64 35.8,51 47.8,51 v1(48.1,51.3) ; U1.22 81.15,55.641 v1@81.15,50.2
  Bottom Layer w0.3: v1(48.1,51.3) 48.7,51.9 78.4,51.9 80.1,50.2 v1(81.1,50.2)
NetU1_8: U1.8 U3.3 | length 87.7
  Top Layer w0.2: v1(67.7,62) 67.7,61.39 67.5,61.19 67.5,60.2 68.3,59.4 69.9,59.4 70.281,59.781 U1.8 ; v1@80.6,72.9 82.034,72.9 84.234,70.7 91.469,70.7 101.469,60.7 125.2,60.7 126.8,59.1 129.5,59.1 v1(131.5,57.1)
  Bottom Layer w0.2: v1@67.7,61.9 v1(67.7,62) 67.7,65.9 72,70.2 77.8,70.2 v1(80.5,72.9) ; v1@131.55,57.05 133.832,59.332 U3.3
NetU1_30: U1.30 U3.2 | length 58
  Top Layer w0.2: U1.30 83.929,62.981 84.31,63.362 v1(86.862,63.362) ; v1@110,55.9 v1(109.8,55.7) v1(132.4,55.7)
  Bottom Layer w0.2: v1(86.862,63.362) 86.9,63.4 102.1,63.4 v1(109.8,55.7) ; v1(132.4,55.7) 132.4,57.3 133.782,58.682 U3.2
NetU1_40: U1.40 U3.4 U3.14 | length 83.4
  Top Layer w0.2: U1.40 76.26,71.16 78.7,73.6 81.9,73.6 84.4,71.1 91.634,71.1 101.634,61.1 125.9,61.1 v1@127.2,59.8
  Bottom Layer w0.2: v1(127.1,59.8) 127.1,59.912 128.1,60.912 128.1,62 131.212,65.112 132.912,65.112 133.548,65.748 133.548,66.145 133.885,66.482 U3.14 ; v1@127.2,59.8 127.1,59.7 127.1,58.7 128,57.8 131.6,57.8 133.782,59.982 U3.4
NetU1_41: U1.41 U3.6 U3.16 | length 82.5
  Top Layer w0.2: U1.41 75.46,70.96 78.5,74 82.1,74 84.6,71.5 91.8,71.5 101.8,61.5 129.6,61.5 130.3,60.8 v1(132,60.8) 132,66.8 133,67.8 v1@136.3,67.8
  Bottom Layer w0.2: v1@132,60.7 132.412,61.112 133.352,61.112 133.522,61.282 U3.6 ; U3.16 136.282,67.782 v1@136.3,67.8
  other v1: 136.5,68
USB_D_N: CONN1.2 U1.42 | length 49
  Top Layer w0.3: U1.42 74.66,65.14 v1(74.8,65)
  Bottom Layer w0.3: CONN1.2 34.026,62.7 ccw(c34.026,63.12) 34.323,62.823 46.625,62.823 cw(c46.625,60.283) 48.421,62.079 50.148,60.352 ccw(c52.336,62.54) 52.336,59.446 71.048,59.446 ccw(c71.048,62.54) 73.236,60.352 73.648,60.764 ccw(c71.46,62.952) 74.554,62.952 74.554,64.406 cw(c75.394,64.406) v1(74.8,65)
USB_D_P: CONN1.3 U1.43 | length 48.1
  Top Layer w0.3: v1(73.8,65) 73.86,65.06 U1.43
  Bottom Layer w0.3: CONN1.3 34.026,63.5 cw(c34.026,63.08) 34.323,63.377 46.625,63.377 cw(c46.625,60.283) 48.813,62.471 50.54,60.744 ccw(c52.336,62.54) 52.336,60 71.048,60 ccw(c71.048,62.54) 72.844,60.744 73.256,61.156 ccw(c71.46,62.952) 74,62.952 74,64.517 ccw(c73.317,64.517) v1(73.8,65)
V3.3: C2.2 C4.2 C7.2 C9.2 C38.2 C42.2 EXP_I2C.1 EXP_OW.1 FB1.1 FB2.1 ICSP.2 R1.2 R3.2 TEMP1.1 TEMP2.1 U1.7 U1.28 U1.37 U4.3 U5.4 U5.5 | length 217.4
  Top Layer w0.3: R1.2@63.27,75.38 U4.3
  Top Layer w0.5: C4.2 69.567,60.581 U1.7 ; U1.37 C2.2@78.66,68.912 ; C2.2@78.711,69.363 v1(84.963,69.363) ; U1.28 84.515,61.381 C7.2 ; ICSP.2@88.05,35.99 R3.2
  Top Layer w0.8: TEMP1.1 25.8,68.8 25.8,52 26.7,51.1 TEMP2.1 34.6,51.1 35.45,50.25 59.95,50.25 65.9,56.2 v1(65.9,60.85) ; FB2.1 C38.2 53.3,86.8 54.5,88 62.1,88 64.6,85.5 EXP_OW.1 63.27,82.67 U4.3 75.7,78.4 77.5,80.2 ; FB1.1 C42.2 53.9,50.15 ; v1(68.2,60.9) C4.2@68.9,60.2 ; 70.8,35.3 72.2,33.9 85.96,33.9 ICSP.2 89.36,33.9 ; EXP_I2C.1 75.5,82.2 77.5,80.2 ; v1(85.1,72.6) 77.5,80.2
  Top Layer w1: v1(94.2,76.2) 94.818,75.582 U5.5 ; v1@94.257,76.257 94.257,78.043 C9.2
  Bottom Layer w1: v1(65.9,60.85) 68.45,60.85 69.3,61.7 69.3,63.1 73.2,67 84.9,67 85,67.1 ; v1(85,60.2) 85,67.1 ; 85,72.2 85,67.1 ; v1(94.2,76.2) 94.2,77.3 v1(94.2,78.1)
  Bottom Layer w1.5: v1@85.227,72.473 87.004,74.25 90.704,74.25 93.754,77.3 94.2,77.3
V5: C5.2 C8.2 D2.1 L1.2 LCD.2 OpIUM_PWR.1 R8.2 R10.2 R24.2 R26.2 R28.2 Rbacklight.1 U5.1 U5.2 | length 60.5
  Top Layer w0.3: 106.1,77.781 106.1,73.3 106.885,72.515 108.298,72.515 D2.1 ; 106.401,77.199 107.06,76.54 R10.2
  Top Layer w0.8: LCD.2 67.79,88.01 68.653,87.147 Rbacklight.1 100.876,87.081 103.458,87.081 ; OpIUM_PWR.1 87.078,87.125
  Top Layer w1: C8.2 103.5,78.043
V12: C6.1 C10.2 C17.2 C18.2 C19.2 C20.2 C21.1 C22.1 C23.2 C25.2 C26.2 C27.2 C28.2 C29.1 U2.4 U2.5 U3.1 U3.17 U3.18 U3.19 U3.21 U3.26 U3.29 U3.34 U3.36 VIN.1 | length 33.4
  Top Layer w0.5: C6.1 C6.1@115.47,76.109 ; 145.173,60.802 146.278,60.802 ; C18.2@145.173,64.104 146.278,64.104 ; 145.173,66.009 146.278,66.009
  Top Layer w1: C10.2@115.7,71.194 115.8,71.094 115.8,65.5 118,63.3 125.5,63.3 127.2,65
  Bottom Layer w0.4: 132.891,68.432 U3.17 ; v1@146.3,62.582 U3.29 ; v1@146.301,64.532 U3.26 ; v1@146.307,67.782 U3.21 ; v1@146.308,59.332 U3.34
  Bottom Layer w0.5: v1@131.927,69.716 131.927,68.992 C23.2@132.689,68.23 ; v1(133.07,70.732) C25.2@134.429,70.732
  other v1: 147.294,56.508 148.818,56.508 133.832,56.635 135.356,56.635 146.278,59.302 146.278,62.604 146.278,64.509 146.278,67.811 133.07,68.827 131.927,69.843 147.294,70.605 148.818,70.605 135.356,70.732 130.2,81.4 130.2,85.9 133.2,85.9 136.2,85.9 139.2,85.9 142.2,85.9 145.2,85.9 148.2,85.9 151.2,85.9 154.2,85.9 133.2,88.9 136.2,88.9 139.2,88.9 145.2,88.9 148.2,88.9 151.2,88.9 154.2,88.9 148.2,91.8 130.2,91.9 133.2,91.9 136.2,91.9 139.2,91.9 142.2,91.9 145.2,91.9 151.2,91.9 154.2,91.9
VSS: C2.1 C3.1 C4.1 C7.1 C8.1 C9.1 CONN1.4 CONN1.5 CONN1.6 CONN1.7 CONN1.8 CONN1.9 EXP_I2C.4 EXP_OW.3 ICSP.3 LCD.1 LCD.5 LCD.7 LCD.8 LCD.9 LCD.10 LCD.16 LED4.2 LIGHT.4 OpIUM_PWR.2 Q1.2 Q2.2 Q3.2 R14.2 R17.2 R18.2 R19.2 R20.2 R_GND.2 RS1.1 RS2.1 RS3.1 RS4.1 SUPPORT1.1 SUPPORT1.2 SUPPORT2.1 SUPPORT2.2 SUPPORT3.1 SUPPORT3.2 SUPPORT4.1 SUPPORT4.2 TEMP1.3 TEMP2.3 U1.6 U1.29 U4.1 U5.3 U5.6 | length 64.7
  Top Layer w0.5: C4.1 69.605,61.381 U1.6 75.881,61.381 76.681,62.181 U1.29 84.553,62.181 C7.1
  Top Layer w0.7: EXP_OW.3 60.73,82.79 U4.1 ; OpIUM_PWR.2 90.13,73.1 98.476,73.1 ; U5.3 98.476,73.1 ; R_GND.2 110.5,65.8 100.4,65.8 98.476,67.724 U5.6 98.476,73.1
  Bottom Layer w0.2: LCD.1 67.536,88.759 R14.2
pads on no net: B1.4 B2.3 B2.4 B3.3 B3.4 B4.3 B4.4 B5.3 B5.4 B6.3 B6.4 B7.3 B7.4 B8.3 B8.4 CONN1.1 CONN1.MH1 CONN1.MH2 D2.2 ICSP.6 OpIUM_DATA.2 U1.12 U1.13 U1.33 U1.34

## Polygon pours and split planes (outlines as drawn)
GND on Bottom Layer "Top Layer-No Net" (solid, remove dead copper, pour order 39): 118.2,60.8 103.1,75.9 103.1,77.4 103.1,93 103.4,93.3 118.6,93.3
GND on Bottom Layer "Top Layer-No Net" (solid, remove dead copper, pour order 34): 126.7,79.5 126.1,80.1 126.1,83.4 127.4,84.7 127.4,93 127.1,93.3 118.3,93.3 118,93 118,61 125.4,53.6
V12 on Bottom Layer "Top Layer-No Net" (solid, remove dead copper, pour order 33): 127.8,88.8 127.8,93 128,93.2 128.1,93.3 155.2,93.3 155.4,93.1 155.4,85.5 155.4,85.4 155.2,85.2 134.4,85.2 131.6,82.4 129.1,79.9 126.9,79.9 126.8,79.9 126.5,80.2 126.5,81.8 126.5,83.2 127.8,84.5
NetC11_2 on Bottom Layer "Top Layer-No Net" (solid, remove dead copper, pour order 27): 162.266,47.623 161.266,47.623 160.266,48.623 160.266,50.623 160.266,52.623 161.266,53.623 173.266,53.623 174.266,53.623 175.266,52.623 175.266,50.623 175.266,48.623 174.266,47.623
NetC12_2 on Bottom Layer "Top Layer-No Net" (solid, remove dead copper, pour order 28): 162.266,60.877 161.266,60.877 160.266,59.877 160.266,57.877 160.266,55.877 161.266,54.877 173.266,54.877 174.266,54.877 175.266,55.877 175.266,57.877 175.266,59.877 174.266,60.877
NetC15_2 on Bottom Layer "Top Layer-No Net" (solid, remove dead copper, pour order 29): 162.166,66.223 161.166,66.223 160.166,67.223 160.166,69.223 160.166,71.223 161.166,72.223 173.166,72.223 174.166,72.223 175.166,71.223 175.166,69.223 175.166,67.223 174.166,66.223
NetC16_2 on Bottom Layer "Top Layer-No Net" (solid, remove dead copper, pour order 30): 162.2,79.3 161.2,79.3 160.2,78.3 160.2,76.3 160.2,74.3 161.2,73.3 173.2,73.3 174.2,73.3 175.2,74.3 175.2,76.3 175.2,78.3 174.2,79.3
NetC30_2 on Bottom Layer "Top Layer-No Net" (solid, remove dead copper, pour order 26): 149.3,60.5 149.1,60.3 149.1,59.2 149.1,52.6 149.1,52 152.4,48.7 153.4,47.7 155.4,47.7 156.4,48.7 156.4,49.7 156.4,50.7 152.7,54.4 152.7,58.7 152.7,59.1 151.3,60.5
NetC31_2 on Bottom Layer "Top Layer-No Net" (solid, remove dead copper, pour order 25): 156.4,59.9 154.1,62.2 149.3,62.2 149.1,62 149.1,60.7 149.3,60.5 151.3,60.5 152.9,58.9 152.9,57.4 153.4,56.9 155.4,56.9 156.4,57.9
NetC33_2 on Bottom Layer "Top Layer-No Net" (solid, remove dead copper, pour order 24): 149,66.7 149.2,66.5 151.4,66.5 151.9,67 152.7,67.8 152.7,70.1 152.7,72.7 156.5,76.5 156.5,78 155.6,78.9 155.2,79.3 153.4,79.3 152,77.9 149,74.9 149,74.8
NetC32_2 on Bottom Layer "Top Layer-No Net" (solid, remove dead copper, pour order 22): 149,65 149.2,64.8 153.8,64.8 156,67 156.4,67.4 156.4,68.8 156.4,68.9 155.4,69.9 155.2,70.1 153.5,70.1 152.9,69.5 152.9,67.8 151.5,66.4 149.4,66.4 149.2,66.4 149,66.2
GND on Bottom Layer "Top Layer-No Net" (solid, remove dead copper, pour order 21): 146.659,55.746 146.405,55.492 136.245,55.492 135.991,55.746 135.991,71.113 136.245,71.367 146.405,71.367 146.659,71.113
GND on Bottom Layer "Top Layer-No Net" (solid, remove dead copper, pour order 31): 155.4,84.9 134.6,84.8 129.3,79.5 126.7,79.5 125.451,76.796 125.4,53.6 134,45 177,45 177.3,45.3 177.3,93 177,93.3 155.9,93.3 155.7,93.1 155.7,85.2
GND on Top Layer "Top Layer-No Net" (solid, remove dead copper, pour order 40): 113.7,65.3 114.9,65.3 115.1,65.5 115.1,73.1 115.1,73.2 115.6,73.7 116.1,73.7 116.3,73.9 116.3,75.1 116.3,75.3 115.9,75.7 113.5,75.7 113.5,74.8 113.4,74.7 111.6,74.7 110.3,74.7 109.4,75.6 109.363,75.563 108.41,75.563 108.363,75.563 107.1,74.3 107.1,71 107.1,70.9 107.6,70.4 108.3,69.7 109.3,69.7
GND on Top Layer "Top Layer-No Net" (solid, remove dead copper, pour order 38): 118.2,77.4 117.4,78.2 114.1,78.2 113.8,78.5 113.8,79.2 111.2,81.8 111.2,83.5 110.8,83.9 107,83.9 106.5,84.4 106.5,87.5 106.2,87.8 103.3,87.8 103.1,88 103.1,93 103.4,93.3 118.5,93.3
GND on Top Layer "Top Layer-No Net" (solid, remove dead copper, pour order 36): 118.3,93.3 118,93 118,71.5 116.5,69.9 116.5,65.8 118.3,64 125.3,64 126,64.7 126,83.3 127.4,84.7 127.4,93 127.1,93.3
V12 on Top Layer "Top Layer-No Net" (solid, remove dead copper, pour order 37): 115.1,73.1 115.1,73.2 115.6,73.7 116.1,73.7 116.3,73.9 116.3,75.1 116.1,75.3 112.6,75.3 112.3,75.6 112.3,77.1 113,77.8 117.3,77.8 117.6,77.5 117.6,71.6 116.4,70.4
V5 on Top Layer "Top Layer-No Net" (solid, remove dead copper, pour order 23): 103.3,77 103.1,77.2 103.1,87.3 103.3,87.5 106,87.5 106.2,87.3 106.2,84.3 106.6,83.9 106.6,77.2 106.4,77
V12 on Top Layer "Top Layer-No Net" (solid, remove dead copper, pour order 35): 128.065,93.234 127.765,92.934 127.765,84.434 126.465,83.134 126.4,57.3 128.1,55.6 150.2,55.6 151.5,56.9 151.465,84.734 151.865,85.134 155.165,85.134 155.365,85.334 155.365,93.034 155.165,93.234

## Other copper
Top Layer:
  rectangle net V5: 104,77.199 106.401,83.8
  rectangle net V12: 113.148,75.886 113.336,77.386
  rectangle net V5: 104.392,84.265 105.059,86.319
  rectangle net V12: 141.907,86.367 142.581,86.572
  rectangle net V12: 144.473,58.602 146.9,68.6
  rectangle net V12: 140.861,86.572 143.111,88.822
  rectangle net V12: 128.725,87.323 131.625,90.223
  rectangle net GND: 123.4,87.3 126.5,90.3
  rectangle net NetLED2_AB: 164.3,61.3 165.9,65.7
  rectangle net NetLED3_AB: 164.3,42.9 165.9,46.9
  rectangle net NetLED1_AB: 164.3,79.9 165.9,84.2
  region net V3.3: 94.2,78.1 94.257,78.043 95.848,78.043 95.848,77.052 96.6,76.3 95.9,75.6 94.5,75.6 94.5,75.9 94.2,76.2
  region net V12: 126.718,63.351 126.583,63.215 125.8,62.9 126.3,63.4 126.3,63.7
  region net NetC1_1: 110.608,75.944 110.735,76.071 112.132,76.071 112.132,77.214 113.021,77.849 113.275,79.119 110.481,81.913 109.465,80.897 109.465,76.96 109.719,76.706 109.719,75.944
  region net VSS: 96.952,77.408 97.206,78.678 99.873,78.678 100,77.408 98.73,76.519 98.222,76.519
  region net V5: 99.492,76.646 99.873,74.487 101.016,74.487 101.27,76.646 101.651,77.408 100.635,77.408
  region net V3.3: 97.46,76.646 96.317,77.408 95.301,77.408 95.682,76.646 96.063,74.487 97.46,74.487
  region net V3.3: 87.66,35.6 85.7,33.64 85.7,33.5 89.7,33.5
Bottom Layer:
  rectangle net AGND: 133.9,64.532 135.8,65.8
  rectangle net V12: 141.907,86.367 142.581,86.572
  rectangle net V12: 128.6,87.1 132,90.5
  rectangle net GND: 123.4,87.1 126.8,90.4
  rectangle net V12: 134.1,69.225 135.075,70.075
  rectangle net V12: 147.575,69.275 148.55,70.075
  rectangle net V12: 147.575,57.025 148.55,57.925
  rectangle net V12: 134.1,57 135.1,58
  rectangle net NetC33_2: 150.342,67.519 150.661,67.838
  rectangle net NetC33_2: 149.261,67.519 149.58,67.838
  rectangle net NetC16_2: 162.6,73.5 169.163,75.023
  rectangle net NetC16_2: 164.35,76.4 167.45,78.1
  rectangle net NetC16_2: 160.7,75.8 163.6,78.8
  rectangle net NetC16_2: 171.8,73.9 174.7,76.7
  rectangle net NetC15_2: 162.6,70.4 169.2,71.9
  rectangle net NetC15_2: 164.35,67.3 167.45,69
  rectangle net NetC15_2: 160.8,66.7 163.7,69.5
  rectangle net NetC15_2: 171.75,68.65 174.65,71.55
  rectangle net GND: 164.35,64.4 167.45,65.922
  rectangle net GND: 164.35,61.081 167.45,62.7
  rectangle net NetC12_2: 164.35,58.1 167.45,59.8
  rectangle net NetC12_2: 160.8,57.5 163.6,60.3
  rectangle net NetC12_2: 162.7,55 165.9,56.6
  rectangle net NetC12_2: 166.144,55 169.3,56.562
  rectangle net NetC12_2: 171.7,55.5 174.6,58.3
  rectangle net NetC11_2: 171.65,50.25 174.55,53.15
  rectangle net NetC11_2: 162.7,51.962 169.244,53.5
  rectangle net NetC11_2: 164.45,48.8 167.55,50.5
  rectangle net NetC11_2: 160.8,48.2 163.7,51.1
  rectangle net GND: 164.45,45.9 167.55,47.419
  rectangle net GND: 164.35,79.504 167.45,81
  rectangle net NetC33_2: 153,75.9 155.8,78.7
  rectangle net NetC31_2: 152.9,57.4 155.988,60.312
  rectangle net NetC30_2: 152.8,48.3 155.9,51.2
  rectangle net GND: 140.9,78.9 143.3,81.4
  rectangle net V12: 140.861,86.572 143.111,88.9
  region net V3.3: 92.1,75.7 94.2,75.7 94.2,77.1 94,77.3
  region net V12: 135.8,71.1 135.5,71.4 132.6,71.4 131.3,70.1 131.3,68.1 131.6,67.8 133.1,67.8 133.5,68.2 135.8,68.2

## Silkscreen, mask and mechanical layers (free items; w line width, h text height)
Top Overlay:
  lines w0.127: 55.25,33.4 155.25,33.4 155.25,93.4 55.25,93.4 55.25,33.4

## Text inside footprints (layer, text, board x,y; h text height)
C21: Bottom Overlay "+" at 140.462,89.662 h1.5 r90
C22: Bottom Overlay "+" at 127.282,71.089 h1.5 r90
C29: Bottom Overlay "+" at 129.778,82.032 h1.5 r90
CONN1: Mechanical 1 "PCB Edge" at 24.568,59.464 h0.25 r270
LED1: Top Overlay "B" at 163.525,84.175 h1.8 r180; Top Overlay "G" at 163.6,80.575 h1.8 r180; Top Overlay "R" at 163.525,82.325 h1.8 r180
LED2: Top Overlay "B" at 163.525,65.675 h1.8 r180; Top Overlay "G" at 163.6,62.075 h1.8 r180; Top Overlay "R" at 163.525,63.825 h1.8 r180
LED3: Top Overlay "B" at 163.525,46.875 h1.8 r180; Top Overlay "G" at 163.6,43.275 h1.8 r180; Top Overlay "R" at 163.525,45.025 h1.8 r180